# Altium PCB RN2483_breakout.PcbDoc
Units mm, origin at the board's own origin, x right, y up, seen from the top; angles counter-clockwise.
Board outline 40.27 x 45.25 mm, 2 copper layers (Top Layer, Bottom Layer); 20 components, 19 nets, 102 pads, 0 vias.
Unrouted connection lines stored in the file: 1.
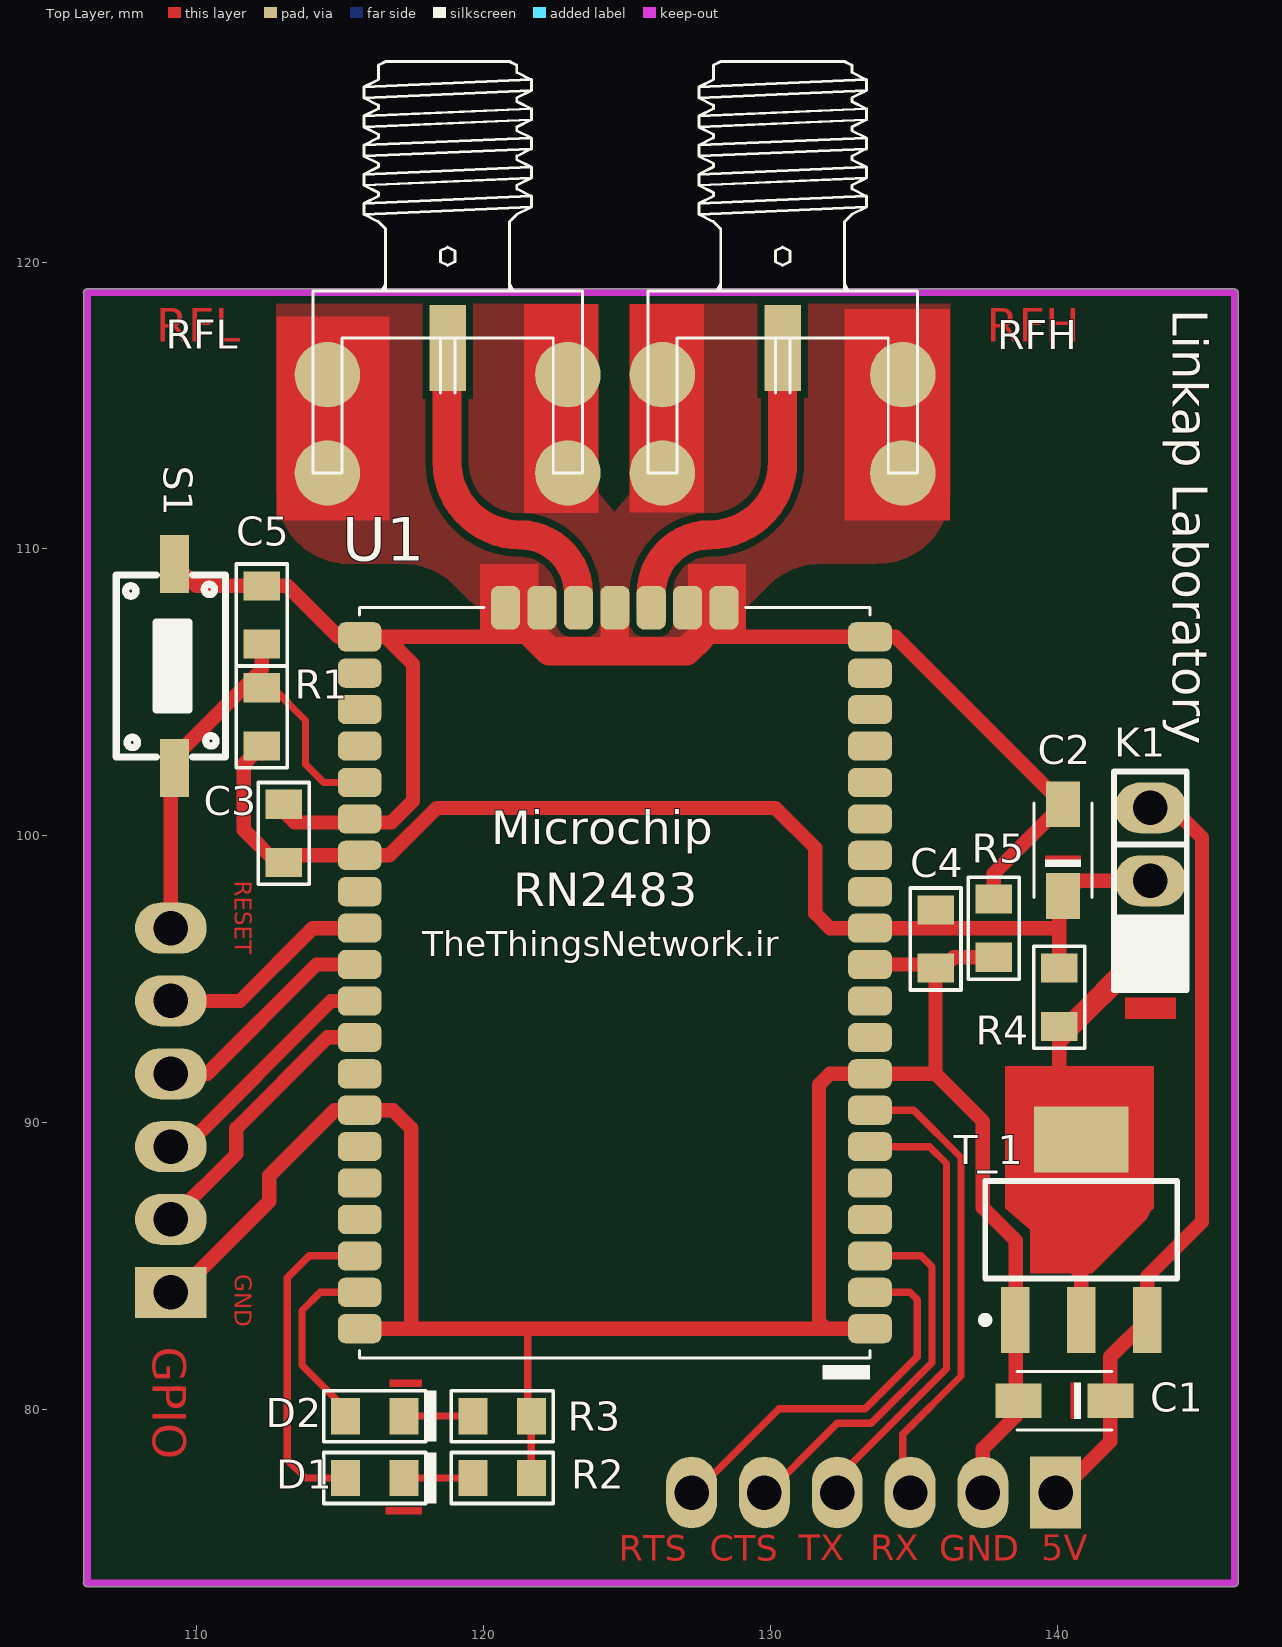
[diagram p0: Top Layer view]
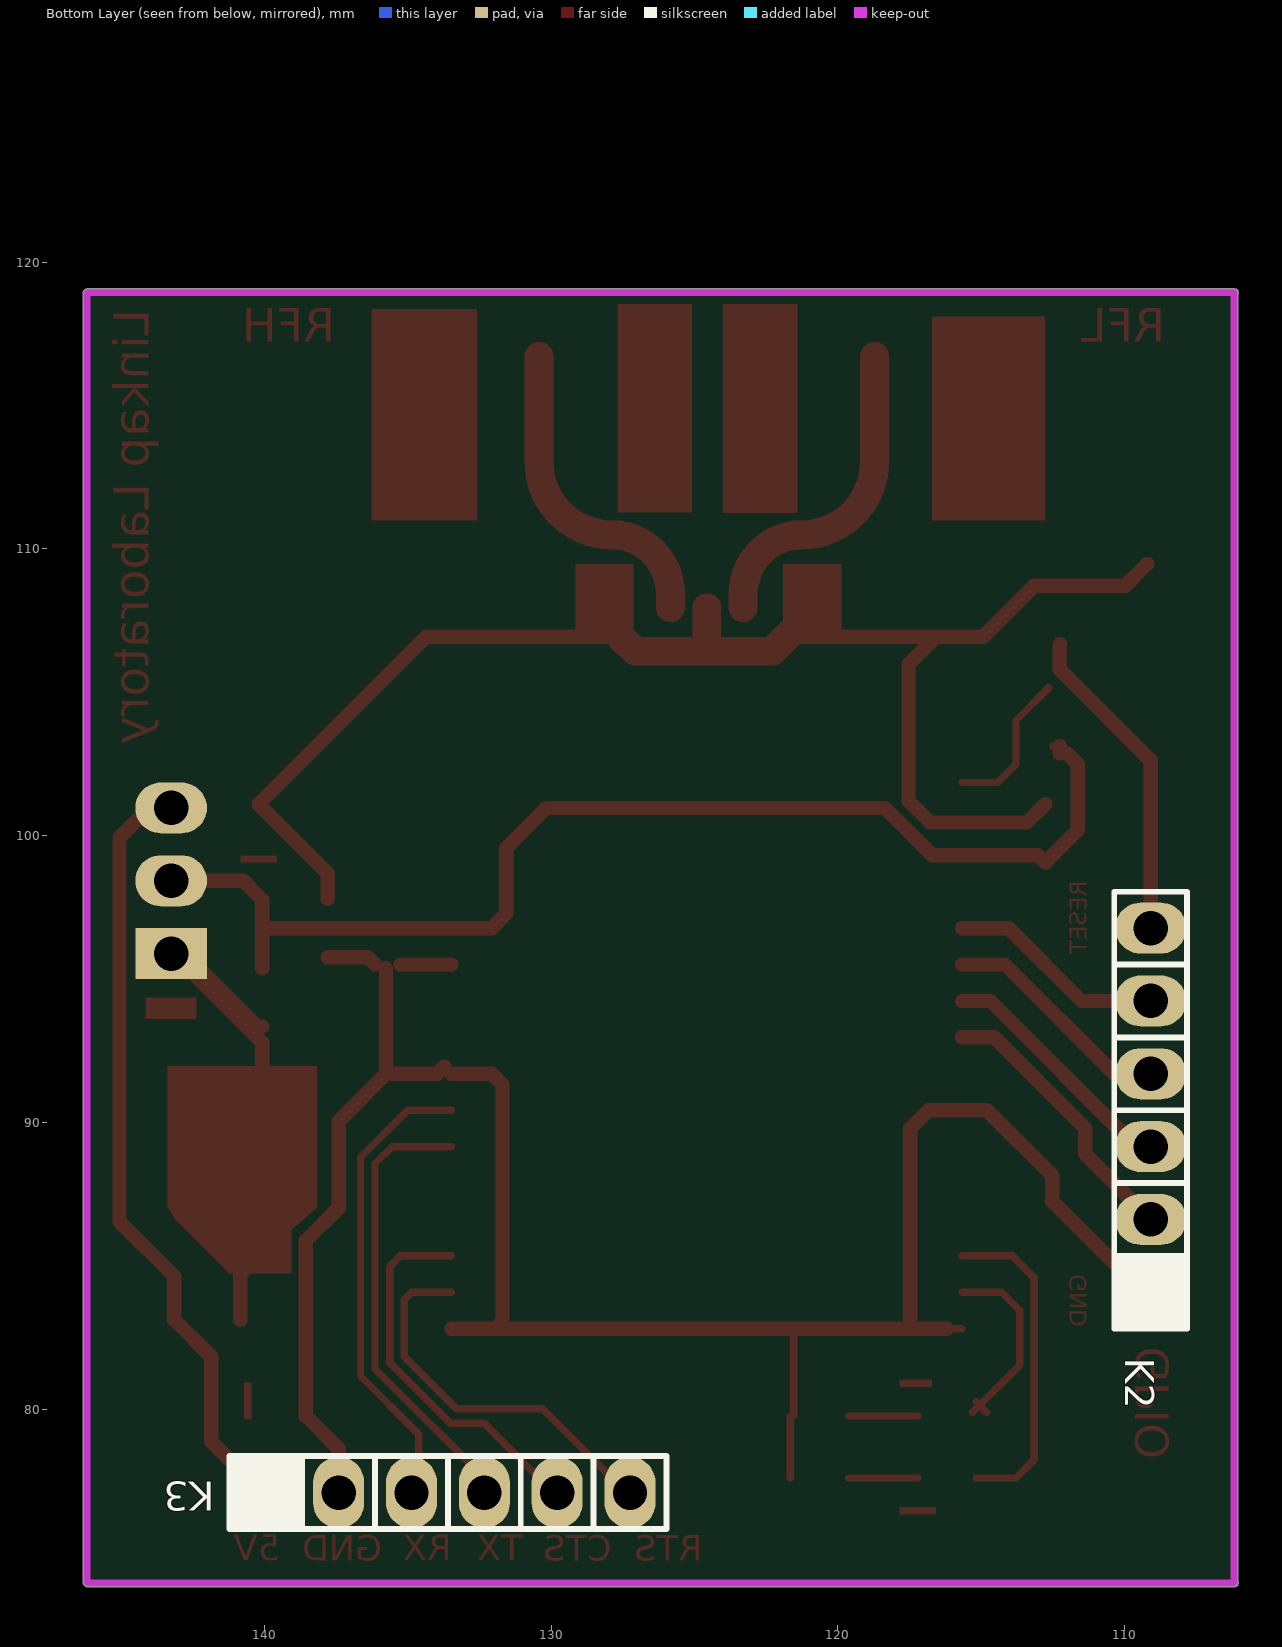
[diagram p1: Bottom Layer view, seen from below]

## Layer stack, top to bottom
Top Solder: solder mask 0.0102, Solder Resist, Dk 3.5
Top Layer: signal copper 0.0356
Dielectric 1: dielectric 0.32, FR-4, Dk 4.8
Bottom Layer: signal copper 0.0356
Bottom Solder: solder mask 0.0102, Solder Resist, Dk 3.5

## Board outline
106.172,73.811 cw(c106.172,73.938) 106.061,74 106.061,118.876 cw(c106.172,118.938) 106.172,119.065 146.188,119.065 cw(c146.188,118.938) 146.315,118.938 cw(c146.188,118.938) 146.315,118.934 cw(c146.188,118.93) 146.315,118.93 146.315,73.938 cw(c146.188,73.938) 146.188,73.811

## Design rules (kind name [scope] priority, off if disabled: settings)
Clearance [All] p1: gap=0.254
PlaneClearance [All] p1: clearance=0.5
PolygonConnect [All] p1: connectstyle=Direct reliefconductorwidth=0.254 reliefentries=4 polygonreliefangle="90 Angle" airgapwidth=0.01
RoutingVias [All] p1: holewidth=0.711 width=1.27 viastyle="Through Hole" minholewidth=0.711 minwidth=1.27 maxholewidth=0.711 maxwidth=1.27
SolderMaskExpansion [All] p1: expansion=0.102
Width [All] p1: maxlimit=3.048 minlimit=0.254 preferedwidth=0.254
28 further rules are at their usual default settings.

## Components (designator, comment, footprint, x,y, rotation, side; value= is the part's Value field where it differs from the comment)
C1 "220uF" TANTAL_SIZEA 141.859,80.289 r90 top
C2 "220uF" TANTAL_SIZEA 140.208,97.892 r0 top
C3 "100nF" 0805C-GENERIC 113.03,99.314 r90 top
C4 "100nF" 0805C-GENERIC 135.763,97.155 r270 top
C5 "100nF" 0805C-GENERIC 112.268,106.934 r90 top
D1 "LED-3MM-GENERIC" 0805R-GENERIC 115.443,77.597 r0 top
D2 "LED-3MM-GENERIC" 0805R-GENERIC 115.443,79.756 r0 top
K1 "HEADER-1X3" HEADER-1X3 143.256,95.885 r180 top (schematic designator Vcc)
K2 "HEADER-1X6" HEADER-1X6 109.093,84.074 r0 bottom (schematic designator GPIO)
K3 "HEADER-1X6" HEADER-1X6 139.954,77.089 r90 bottom
R1 "1K" 0805R-1K8 112.268,103.378 r90 top
R2 "330R" 0805R-1K8 119.888,77.597 r0 top
R3 "330R" 0805R-1K8 119.888,79.756 r0 top
R4 "0R" 0805R-GENERIC 140.081,95.123 r270 top
R5 "0R" 0805R-GENERIC 137.795,96.012 r90 top
RFH "SMA-EL" SMA-ENDLAUNCH 130.429,115.189 r90 top (schematic designator K2)
RFL "SMA-EL" SMA-ENDLAUNCH 118.745,115.189 r90 top (schematic designator K1)
S1 "SW-PB" SW 109.22,102.362 r90 top (schematic designator S?)
T_1 "AMS1117" SOT-223B_M 140.843,86.258 r90 top
U1 "RN2483" RN2483 133.477,82.804 r0 top

## Footprints (in the part's own frame and the unit in brackets; to place one, negate y for a bottom-side part, rotate by r counter-clockwise, add the part's x,y. Pads: shape width x height; smd on the part's side, far side on the other; paste and mask are expansions set on the pad)
0805C-GENERIC [mil] "CAPACITOR 0805"
  rect 40x50 smd: 1(-10,0) 2(70,0)
  silkscreen extent -40,-35 100,35, body extent -11,-25 70,25, height 26
0805R-1K8 [mil] "RESISTOR 0805"
  rect 40x50 smd: 1(-10,0) 2(70,0)
  silkscreen extent -40,-35 100,35, body extent -11,-25 70,25, height 27
0805R-GENERIC [mil] "RESISTOR 0805"
  rect 40x50 smd: 1(-10,0) 2(70,0)
  silkscreen extent -40,-35 100,35, body extent -11,-25 70,25, height 27
HEADER-1X3 [mm]
  rect 2.5x1.778 hole 1.2: 1(0,0)
  oval 2.5x1.778 hole 1.2: 2(0,-2.54) 3(0,-5.08)
  silkscreen extent -1.27,-6.35 1.27,1.27, body extent -1.27,-6.35 1.27,1.27, height 11.94
HEADER-1X6 [mm]
  rect 2.5x1.778 hole 1.2: 1(0,0)
  oval 2.5x1.778 hole 1.2: 2(0,-2.54) 3(0,-5.08) 4(0,-7.62) 5(0,-10.16) 6(0,-12.7)
  silkscreen extent -1.27,-13.97 1.27,1.27, body extent -1.27,-13.97 1.27,1.27, height 11.94
RN2483 [mil] "RN2483_MICROCHIP"
  rrect50% 60x40 smd: 1(0,0) 2(0,50) 3(0,100) 4(0,150) 5(0,200) 6(0,250) 7(0,300) 8(0,350) 9(0,400) 10(0,450) 11(0,500) 12(0,550) 13(0,600) 14(0,650) 15(0,700) 16(0,750) 17(0,800) 18(0,850) 19(0,900) 20(0,950) 28(-700.79,950) 29(-700.79,900) 30(-700.79,850) 31(-700.79,800) 32(-700.79,750) 33(-700.79,700) 34(-700.79,650) 35(-700.79,600) 36(-700.79,550) 37(-700.79,500) 38(-700.79,450) 39(-700.79,400) 40(-700.79,350) 41(-700.79,300) 42(-700.79,250) 43(-700.79,200) 44(-700.79,150) 45(-700.79,100) 46(-700.79,50) 47(-700.79,0)
  rrect50% 40x60 smd: 21(-200.39,990) 22(-250.39,990) 23(-300.39,990) 24(-350.39,990) 25(-400.39,990) 26(-450.39,990) 27(-500.39,990)
  silkscreen extent -701,-70 0,990
SMA-ENDLAUNCH [mil]
  rect 118.11x50 smd: 1(71.3,0)
  round 90 smd: 2(-100,165) 3(-100,-165) 4(35,-165) 5(35,165)
  silkscreen extent -100,-185 465,185, body extent -127,-120 470,130, height 140
SOT-223B_M [mm] "SOT223, 4-Leads, Body 6.5x3.5mm, Pitch 2.3mm, Lead Span 7mm, IPC Low Density"
  rect 2.3x1 smd: 1(-3.15,2.3) 2(-3.15,0) 3(-3.15,-2.3)
  rect 2.3x3.3 smd: 4(3.15,0)
  silkscreen extent -3.27,-3.35 1.7,3.47, body extent -1.85,-3.35 1.85,3.35, height 1.8
SW [mil]
  rect 80x40 smd: 1(0,0) 2(280,0)
  silkscreen extent 15,-70 265,80, body extent -14,-64 294,74, height 137
TANTAL_SIZEA [mm]
  rect 1.2x1.6 smd: +(0,0) -(0,3.2)
  silkscreen extent -1.02,-0.05 1.02,3.25

## Part data
C1: library part 220UF-5MM, "SIZEA_TANTALIUM_CAPACITOR POLARISED"
C2: library part 220UF-5MM, "SIZEA_TANTALIUM_CAPACITOR"
C3 C4 C5: library part 0805C-10UF-6V3-X5R-PAN, "CAPACITOR 0805 CERAMIC"
D1 D2: "GENERIC LED 3MM"
K1 K2 K3: "2.54 mm PIN HEADER"
R1 R2 R3: library part 0805R-1K8, "RESISTOR 0805 1/4 WATT THIN FILM"
R4 R5: library part 0805R-0R, "RESISTOR 0805 1/4 WATT THIN FILM"
RFH RFL: "SMA THREADED RF CONNECTOR VERTICAL"
S1: "SMD Switch"
T_1: library part LM7815, "Voltage Regulator"
U1: "RN2483 - Microchip"

## Nets (pads, with @x,y where several pads share a name; then routed paths per layer and width w, separated by ;. In a path a pad name is that pad's centre, name@x,y a point inside that pad or via, vN(x,y) a via of type N, cw(c..) or ccw(c..) an arc to the next point about the centre after c; other vN are vias at no path point)
3.3V: K1.1 R4.2 T_1.2 T_1.4 | length 18.7
  Top Layer w0.5: R4.2 140.257,93.345 142.797,95.885 K1.1 143.178,95.885 140.081,92.788 140.081,85.471 140.843,84.709 T_1.2
CTS: K3.5 U1.3 | length 13.8
  Top Layer w0.254: K3.5@129.54,76.708 132.334,79.502 133.521,79.502 135.636,81.617 135.636,84.963 135.255,85.344 U1.3
GND: C1.- C2.- C3.2 C4.2 C5.2 K2.1 K3.2 R2.2 R3.2 R5.1 R5.2 RFH.2 RFH.3 RFH.4 RFH.5 RFL.2 RFL.3 RFL.4 RFL.5 S1.2 T_1.1 U1.1 U1.8 U1.11 U1.20 U1.21 U1.22 U1.24 U1.26 U1.27 U1.28 U1.33 U1.41 U1.47 | length 130.4
  Top Layer w0.254: U1.47 U1.47@116.205,82.804 ; R3.2@121.539,79.756 121.539,82.804 ; R2.2 R3.2 ; 132.08,82.804 132.334,82.804
  Top Layer w0.5: K2.1 109.347,84.074 112.522,87.249 112.522,88.138 114.808,90.424 116.84,90.424 117.475,89.789 117.475,82.804 ; S1.2 109.982,108.712 C5.2 113.157,108.712 114.935,106.934 116.586,106.934 ; C3.2@112.776,101.092 113.411,100.457 116.776,100.457 117.538,101.219 117.538,105.981 116.586,106.934 ; U1.47@116.205,82.804 117.475,82.804 ; 120.523,106.934 116.586,106.934 ; U1.21 128.387,107.452 128.905,106.934 134.366,106.934 C2.- 137.795,98.679 R5.2 ; 131.953,82.804 131.699,83.058 131.699,91.313 132.08,91.694 U1.8 ; U1.1 121.539,82.804 117.475,82.804 ; U1.11 C4.2@135.255,95.504 ; U1.8@133.731,91.948 133.985,91.694 135.763,91.694 ; C4.2 135.763,91.694 ; C4.2@136.144,95.504 136.398,95.758 R5.1 ; K3.2 137.414,78.613 138.557,79.756 138.557,85.877 137.414,87.02 137.414,90.043 135.763,91.694
  Top Layer w1: U1.27 122.291,106.426 124.577,106.426 ; U1.24@124.569,107.95 U1.24 124.577,106.426 ; 127.57,106.924 127.072,106.426 124.577,106.426
NetC5_1: C5.1 K2.6 R1.2 S1.1 U1.32 | length 16.5
  Top Layer w0.254: R1.2@112.649,105.156 113.792,104.013 113.792,102.489 114.427,101.854 U1.32
  Top Layer w0.5: K2.6 109.093,102.616 112.268,105.791 C5.1
NetD1_A: D1.1 U1.45 | length 11.5
  Top Layer w0.254: D1.1 113.792,77.597 113.157,78.232 113.157,84.582 113.919,85.344 U1.45
NetD1_K: D1.2 R2.1 | length 2.4
  Top Layer w0.254: D1.2 R2.1
NetD2_A: D2.1 U1.46 | length 7.1
  Top Layer w0.254: D2.1@114.808,79.883 D2.1@115.189,80.264 ; D2.1@115.316,79.883 113.665,81.534 113.665,83.439 114.3,84.074 U1.46
NetD2_K: D2.2 R3.1 | length 2.4
  Top Layer w0.254: D2.2 R3.1
NetK2_2: K2.2 U1.39 | length 9.7
  Top Layer w0.5: K2.2 111.379,88.9 111.379,89.789 114.554,92.964 U1.39
NetK2_3: K2.3 U1.38 | length 8.7
  Top Layer w0.5: K2.3 109.601,89.154 114.681,94.234 U1.38
NetK2_4: K2.4 U1.37 | length 8.2
  Top Layer w0.5: K2.4 110.363,91.694 114.173,95.504 U1.37
NetK2_5: K2.5 U1.36 | length 7.6
  Top Layer w0.5: K2.5 111.506,94.234 114.046,96.774 U1.36
NetRFH_1: RFH.1 U1.23 | length 11.4
  Top Layer w1.016: U1.23 125.847,108.448 cw(c127.889,108.448) 127.889,110.49 ccw(c127.889,113.03) 130.429,113.03 RFH.1@130.429,116.713
NetRFL_1: RFL.1 U1.25 | length 11.4
  Top Layer w1.016: RFL.1@118.725,116.713 118.725,113.03 ccw(c121.265,113.03) 121.265,110.49 cw(c121.265,108.448) 123.307,108.448 U1.25
RTS: K3.6 U1.2 | length 14
  Top Layer w0.254: K3.6@127,76.708 130.302,80.01 133.31,80.01 135.128,81.828 135.128,83.82 134.874,84.074 U1.2
RX: K3.3 U1.7 | length 16.8
  Top Layer w0.254: U1.7 135.001,90.424 136.652,88.773 136.652,81.153 134.62,79.121 K3.3@134.62,76.708
TX: K3.4 U1.6 | length 16.4
  Top Layer w0.254: K3.4@132.08,76.708 132.08,77.343 136.144,81.407 136.144,88.563 135.553,89.154 U1.6
VCC: C2.+ C3.1 C4.1 K1.2 R1.1 R4.1 U1.12 U1.34 | length 41.6
  Top Layer w0.254: R1.1@112.268,102.87 R1.1@112.522,103.124
  Top Layer w0.5: R1.1@112.014,102.87 111.633,102.489 111.633,100.203 112.776,99.06 113.03,99.314 U1.34 116.713,99.314 118.364,100.965 130.175,100.965 131.572,99.568 131.572,97.282 132.08,96.774 U1.12 139.827,96.774 ; R1.1@112.268,102.87 R1.1 ; R4.1 C2.+@140.081,97.765 ; C2.+ 140.741,98.425 K1.2
VIN: C1.+ K1.3 K3.1 T_1.3 | length 27.7
  Top Layer w0.5: K3.1@139.7,76.708 141.859,78.867 C1.+ 141.859,81.824 T_1.3 143.143,84.621 145.057,86.535 145.057,99.926 144.018,100.965 K1.3
pads on no net: U1.4 U1.5 U1.9 U1.10 U1.13 U1.14 U1.15 U1.16 U1.17 U1.18 U1.19 U1.29 U1.30 U1.31 U1.35 U1.40 U1.42 U1.43 U1.44

## Polygon pours and split planes (outlines as drawn)
GND on Top Layer "Bottom Layer-No Net" (solid, pour order 10): 136.271,118.872 136.271,112.014 cw(c133.731,112.014) 133.731,109.474 133.096,109.474 132.461,109.474 131.745,109.474 ccw(c131.745,106.934) 129.949,108.73 128.778,107.559 cw(c127.168,109.169) 127.168,106.892 121.783,106.892 cw(c121.783,109.22) 120.137,107.574 118.999,108.712 118.981,108.73 ccw(c117.185,106.934) 117.185,109.474 116.332,109.474 115.316,109.474 cw(c115.316,112.014) 112.776,112.014 112.776,118.93

## Keep-outs
Keep-Out Layer:
  lines w0.254: 106.172,73.938 146.188,73.938 146.188,118.93 ; 106.172,118.938 146.188,118.938 ; 106.188,73.938 106.188,118.938
  text "Designed by Zeyghami - V 1.1" at 142.24,118.11 h1.6 r270

## Other copper
Top Layer:
  rectangle net 3.3V: 138.176,87.02 143.383,91.973
  rectangle net GND: 121.412,111.25 124.006,118.542
  rectangle net GND: 125.095,111.261 127.689,118.542
  rectangle net GND: 132.588,110.998 136.271,118.364
  rectangle net GND: 112.776,110.998 116.713,118.11
  rectangle net GND: 119.878,106.68 121.91,109.474
  rectangle net GND: 127.127,106.68 129.159,109.474
  region: 144.145,93.599 144.145,94.361 142.367,94.361 142.367,93.599
  rectangle: 140.462,79.654 140.716,80.924
  region: 140.843,99.06 140.843,99.314 139.573,99.314 139.573,99.06
  rectangle: 116.713,80.772 117.856,81.026
  rectangle: 116.586,76.327 117.856,76.581
  pour cut-out: 125.72,119.126 125.72,112.649 124.552,111.286 123.434,112.649 123.434,119.126
  region net 3.3V: 143.383,87.02 143.256,86.893 143.129,86.639 141.224,84.734 139.065,84.734 139.065,86.258 138.176,87.02
  text "Linkap Laboratory" at 143.637,118.364 h2.1 r270
  text "RFL" at 108.585,116.84 h2
  text "RFH" at 137.541,116.84 h2
  text "RESET" at 111.125,98.425 h1 r270
  text "GND" at 111.125,84.709 h1 r270
  text "GPIO" at 108.077,82.169 h2 r270
  text "TX" at 130.99,74.438 h1.52
  text "RX" at 133.477,74.438 h1.52
  text "5V" at 139.446,74.438 h1.52
  text "RTS" at 124.714,74.422 h1.52
  text "CTS" at 127.889,74.422 h1.52
  text "GND" at 135.89,74.422 h1.52

## Silkscreen, mask and mechanical layers (free items; w line width, h text height)
Top Overlay:
  rectangle: 117.983,78.867 118.364,80.645
  rectangle: 117.983,76.708 118.364,78.486
  text "Linkap Laboratory" at 143.637,118.364 h2.1 r270
Top Solder:
  rectangle: 113.284,111.125 115.824,118.745
  rectangle: 121.666,111.125 124.206,118.745
  rectangle: 124.968,111.125 127.508,118.745
  rectangle: 133.35,111.125 135.89,118.745

## Dimensions
146.188,73.938 to 146.188,118.938 on Keep-Out Layer
146.188,73.938 to 106.188,73.938 on Keep-Out Layer

## Text inside footprints (layer, text, board x,y; h text height)
U1: Top Overlay "Microchip" at 120.269,99.314 h2; Top Overlay "TheThingsNetwork.ir" at 117.856,95.504 h1.5